# Altium PCB OSI_A15.PcbDoc (part 1 of 2)
Units mil, origin at the board's own origin, x right, y up, seen from the top; angles counter-clockwise.
Board outline 5750 x 3400 mil, 2 copper layers (Top Layer, Bottom Layer); 1 components, 123 nets, 352 pads, 0 vias.
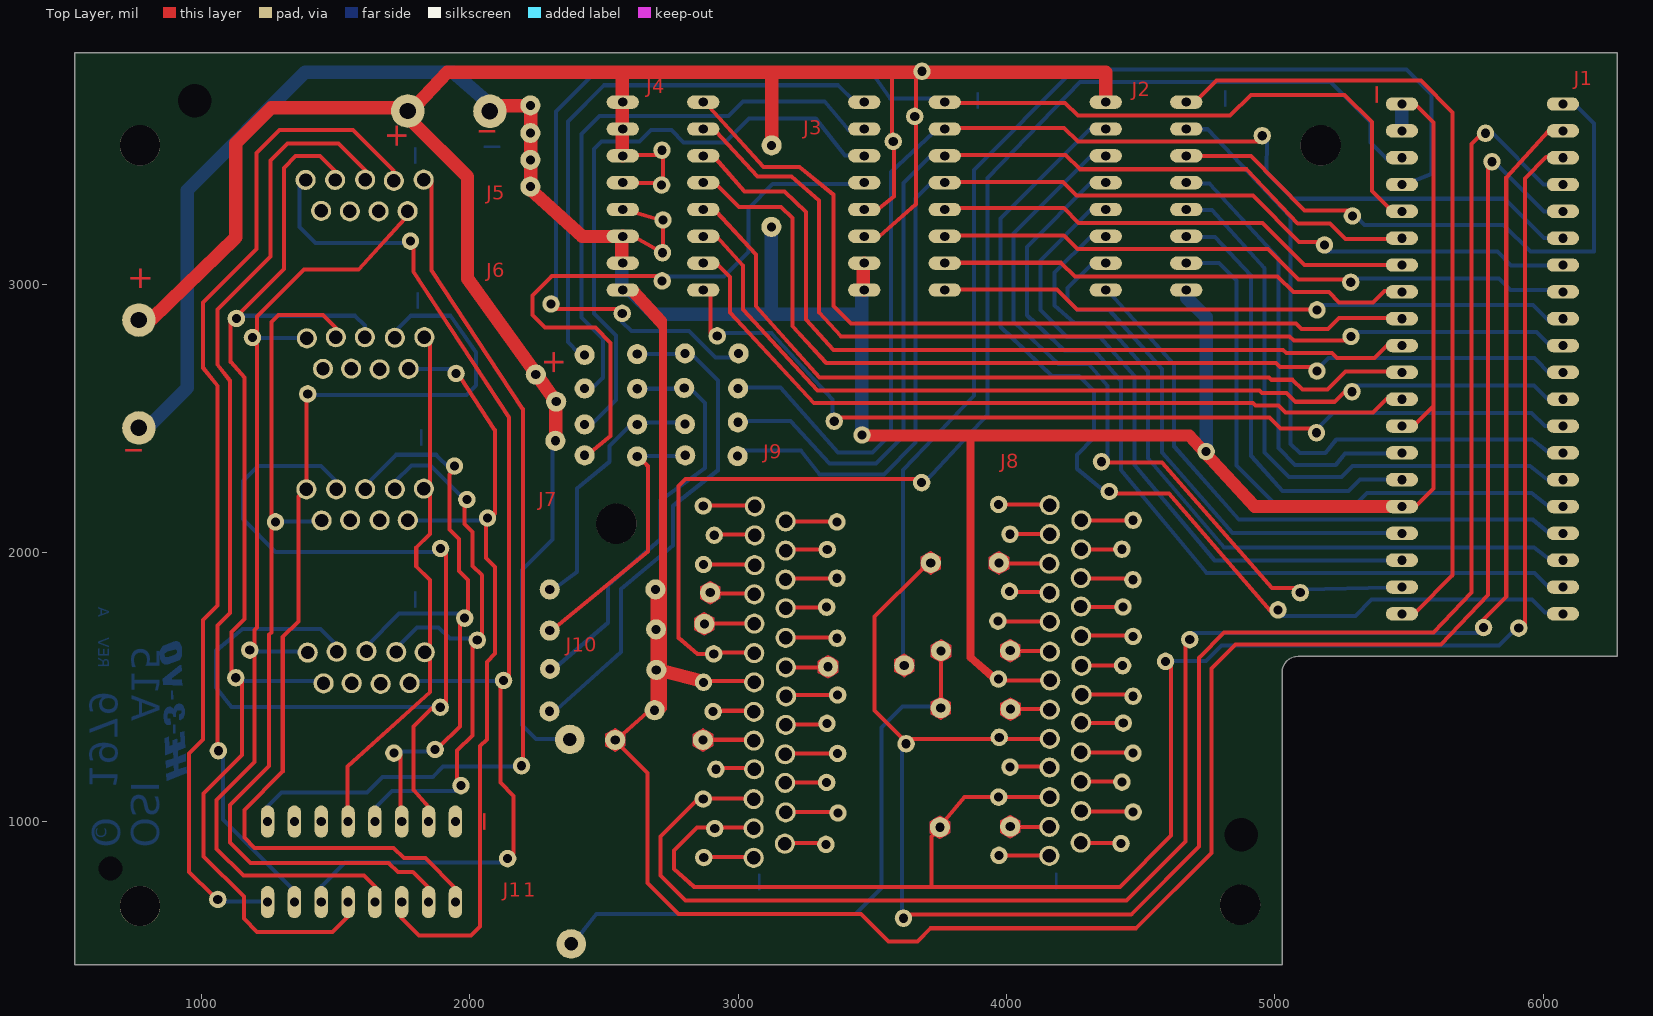
[diagram p0: Top Layer view]
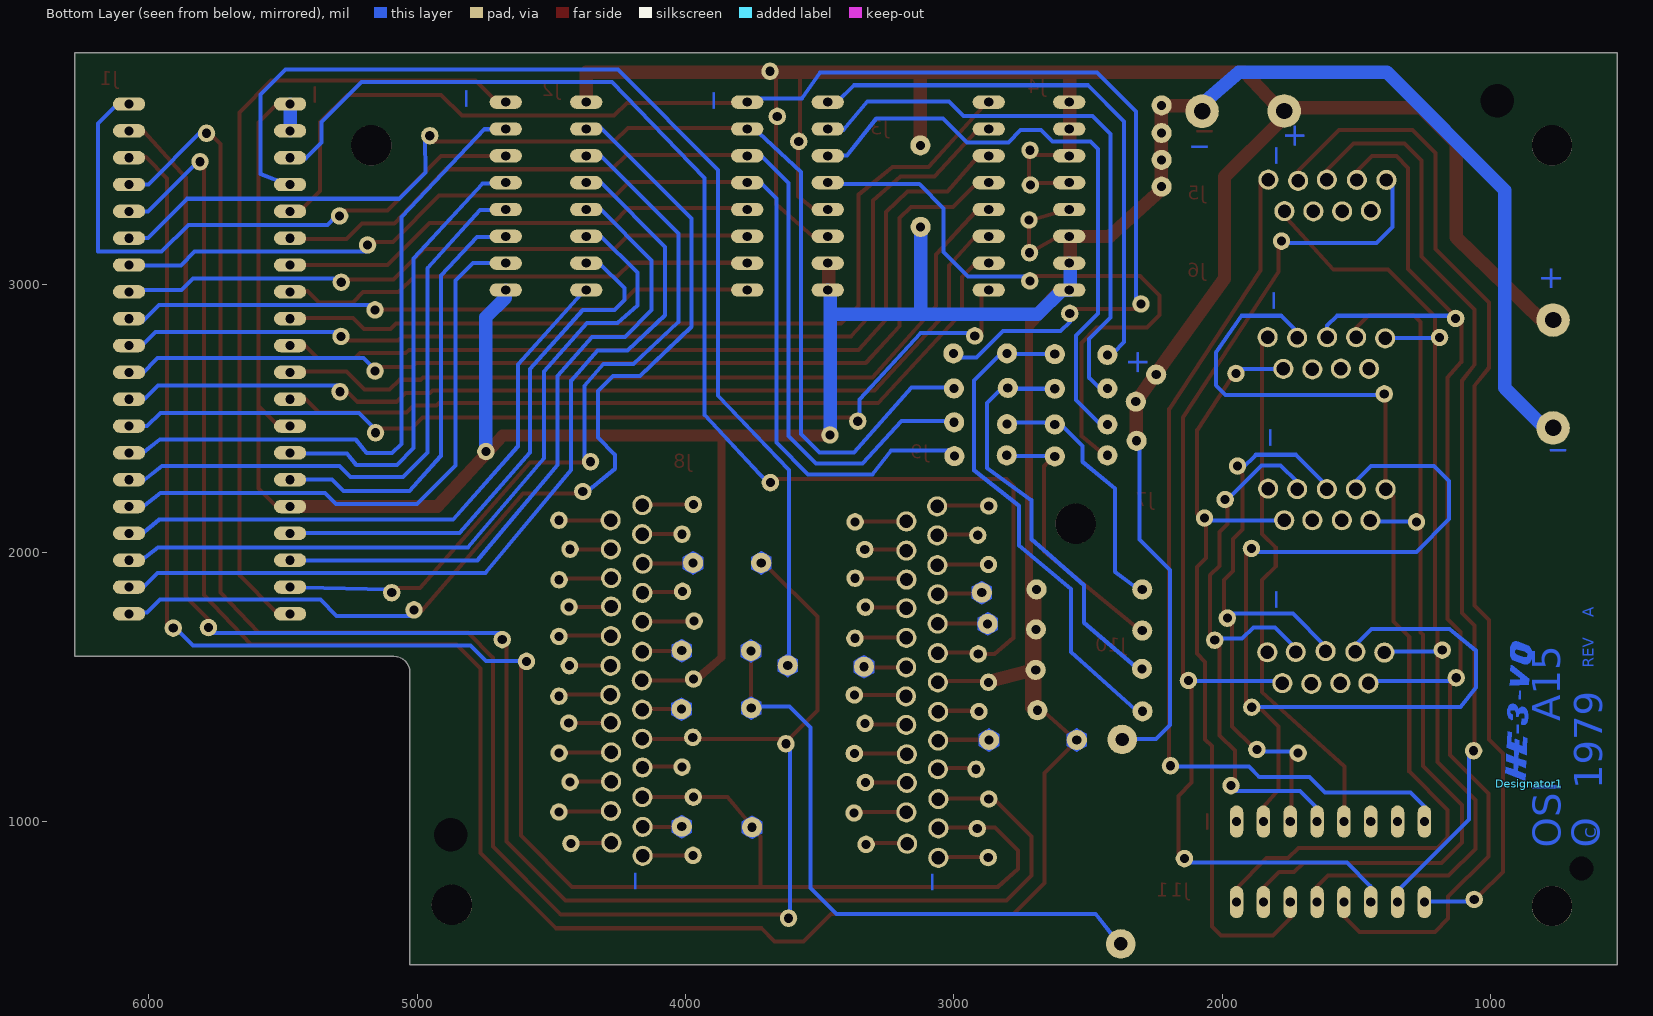
[diagram p1: Bottom Layer view, seen from below]

## Layer stack, top to bottom
Top Solder: solder mask 0.4, Solder Resist, Dk 3.5
Top Layer: signal copper 1.4
Dielectric 1: dielectric 12.6, FR-4, Dk 4.8
Bottom Layer: signal copper 1.4
Bottom Solder: solder mask 0.4, Solder Resist, Dk 3.5

## Board outline
527,464 527,3864 6277,3864 6277,1614 5087,1613.9 5075.2,1612.8 5064,1609.4 5053.6,1603.8 5044.5,1596.4 5037.1,1587.3 5031.5,1576.9 5028.1,1565.7 5027,1554 5027,464

## Design rules (kind name [scope] priority, off if disabled: settings)
Clearance [All] p1: gap=10 ignorepadtopadclearanceinfootprint=FALSE except(0: Arc-Hole Track-Hole SMDPad-Hole THPad-Hole Via-Hole Fill-Hole Poly-Hole Region-Hole Text-Hole; 6: Arc-Text Track-Text)
HoleSize [All] p1: absolutevalues=TRUE maxlimit=250 minlimit=8 maxpercent=80.000 minpercent=20.000
MinimumSolderMaskSliver [All] p1: minsoldermaskwidth=0.5
PolygonConnect [All] p1: connectstyle=Relief reliefconductorwidth=10 reliefentries=4 polygonreliefangle="90 Angle" airgapwidth=10
RoutingVias [All] p1: holewidth=28 width=50 viastyle="Through Hole" minholewidth=28 minwidth=50 maxholewidth=28 maxwidth=50
SolderMaskExpansion [All] p1: expansion=4
Width [All] p1: maxlimit=60 minlimit=6 preferedwidth=10 minimp=50.000000 maximp=50.000000 favimp=50.000000
28 further rules are at their usual default settings.

## Components (designator, comment, footprint, x,y, rotation, side; value= is the part's Value field where it differs from the comment)
Designator1 "Comment" HHE-3-V0 855,1139 r93 bottom locked

## Footprints (in the part's own frame and the unit in brackets; to place one, negate y for a bottom-side part, rotate by r counter-clockwise, add the part's x,y. Pads: shape width x height; smd on the part's side, far side on the other; paste and mask are expansions set on the pad)
HHE-3-V0 [mil] "Manufacturing mark HHE-3-V0"
  Top Layer region: 169.23,17 173.63,31 173.64,31.24 173.55,31.46 173.37,31.61 173.13,31.67 173.13,31.67 138.82,31.49 143.37,46.38 158.76,46.45 159.01,46.46 159.22,46.59 159.35,46.8 159.35,46.8 163.83,61.82 163.94,62.03 163.94,62.26 163.84,62.47 163.66,62.62 163.43,62.67 163.43,62.67 148.32,62.61 152.55,76.46 186.72,76.63 186.9,76.5 187.11,76.45 187.32,76.5 187.5,76.63 187.61,76.82 187.61,76.82 191.95,91.03 191.97,91.27 191.87,91.49 191.69,91.65 191.46,91.7 191.46,91.7 156.46,91.52 156.45,91.52 156.44,91.52 156.44,91.52 156.44,91.52 156.44,91.52 129.19,91.52 128.98,91.48 128.8,91.35 128.7,91.16 128.7,91.16 128.7,91.16 128.7,91.16 128.7,91.15 128.7,91.15 119.94,62.49 98.18,62.4 106.87,90.85 106.88,90.86 106.88,90.86 106.88,90.86 106.88,90.86 106.89,91.09 106.8,91.31 106.62,91.47 106.38,91.52 106.38,91.52 80.09,91.52 79.88,91.48 79.71,91.35 79.6,91.16 79.6,91.16 79.6,91.15 70.78,62.28 50.18,62.2 58.94,90.85 58.94,90.86 58.95,91.09 58.86,91.31 58.68,91.47 58.45,91.52 58.45,91.52 34.26,91.52 34.05,91.48 33.87,91.35 33.77,91.16 33.77,91.16 33.77,91.15 11.2,17.3 11.2,17.29 11.2,17.29 11.2,17.29 11.2,17.3 11.2,17.3 11.2,17.29 11.18,17.22 11.18,17.14 11.18,17.14 11.22,16.95 11.33,16.78 11.49,16.67 11.69,16.63 11.69,16.63 35.88,16.63 36.09,16.67 36.26,16.8 36.37,16.99 36.37,16.99 36.37,16.99 36.37,16.99 36.37,17 36.37,17 45.27,46.11 45.43,46.01 45.63,45.97 45.63,45.97 65.82,46.06 57.03,17.3 57.03,17.29 57.01,17.22 57.01,17.14 57.01,17.14 57.05,16.95 57.16,16.78 57.33,16.67 57.52,16.63 57.52,16.63 83.82,16.63 84.03,16.67 84.2,16.8 84.31,16.99 84.31,16.99 84.31,16.99 84.31,16.99 84.31,17 84.31,17 93.22,46.17 114.98,46.26 106.13,17.3 106.13,17.29 106.11,17.22 106.11,17.14 106.11,17.14 106.17,16.89 106.36,16.7 106.62,16.63 106.62,16.63 133.84,16.46 133.85,16.46 133.86,16.46 133.87,16.46 133.86,16.46 133.84,16.46 133.84,16.46 133.87,16.46 168.75,16.64 168.96,16.68 169.13,16.81 169.23,17
  Top Layer region: 361.67,92.23 368.95,21.16 390.98,21.16 438.29,87.83 437.91,93 417.6,93.57 390.78,54.69 387.72,54.69 383.89,92.42
  Top Layer region: 444.47,45.35 454.01,80.58 456.58,85.56 459.98,89.57 463.83,92.59 467.91,95.08 473.05,97.04 497.45,98.33 506.36,97.35 512.78,95.61 518.45,93.04 523.06,89.79 527.14,82.16 527.51,75.82 526.31,68.49 522.23,57.76 513.33,29.62 504.29,22.01 495.71,18.03 489.52,15.76 466.4,15.23 456.13,18.71 450.16,21.81 443.66,29.28 443.06,40.46 444.47,45.35 469.57,44.97 469.57,34.95 472.29,32.38 483.02,32.23 487.55,37.14 489.67,41.82 491.18,46.81 493.52,54.36 497.3,70.08 497.45,74.16 495.56,77.4 492.46,79.82 489.29,80.88 486.12,80.65 482.42,78.91 479.32,74.23 476.45,67.05 473.96,61.16 470.93,50.66 469.58,44.97
  Top Layer region: 253.75,75.34 234.16,74.15 233.63,78.73 235.62,84.11 239.61,89.15 245.91,92.94 249.3,95 256.27,96.39 265.04,97.26 270.95,96.53 281.04,94.73 286.09,92.28 291.2,86.96 294.59,82.18 295.38,74.94 293.46,69.23 289.67,63.99 286.22,60.47 281.17,58.41 276.92,56.35 276.92,55.29 277.19,54.16 281.57,50.44 284.23,46.06 285.13,37.59 283.82,33.08 281.93,30 277.67,25.75 272.7,22.74 268.52,20.98 255.04,18.69 243,17.84 236.59,18.69 225.72,20.98 219.06,26.47 218.02,29.93 217.43,39.94 219.1,41.62 240.26,40.53 240.26,33.73 242.48,31.24 246.28,30.33 254.78,31.18 259.33,32.91 260.88,36.5 260.21,46.48 256.42,51.32 253.41,53.55 249.42,53.68 246.67,53.94 246.54,61.79 258.58,63.29 264.79,64.47 267.67,66.89 269.96,69.44 270.42,72.12 270.42,81.28 268.52,85.15 261.21,85.48 256.88,81.14 254.98,77.48
  Top Layer region: 311.84,56.46 343.93,56.9 344.55,49.99 312.39,49.15
  Top Layer region: 185.08,57.69 217.17,58.13 217.79,51.22 185.62,50.39

## Free pads (board coordinates)
  round 40 hole 90: 1(660.5,823.5)
  round 125 hole 61: 1(767,2465) 1(767,2867) 1(1769,3646) 1(2075,3645)
  round 150 hole 150: 1(771,683) 1(771,3518) 1(2546,2108) 1(4871,688) 1(5171,3518)
  round 40 hole 125: 1(975.5,3683.5) 1(4875.5,948.5)
  round 65 hole 34: 1(1061,708) 1(1063,1262) 1(1128,1534) 1(1130,2873) 1(1180,1637) 1(1190,2802) 1(1276,2115) 1(1396,2592) 1(1717,1253) 1(1779,3161) 1(1871,1267) 1(1890,1424) 1(1891,2016) 1(1943,2323) 1(1949,2668) 1(1967,1132) 1(1981,1756) 1(1989,2198) 1(2028,1674) 1(2066,2129) 1(2126,1524) 1(2141,860) 1(2193,1206) 1(2303,2927) 1(2568,2892) 1(2715,3370) 1(2716,3500) 1(2717,3013) 1(2718,3118) 1(2720,3240) 1(2870,1082) 1(2870,2174) 1(2871,1517) 1(2871,1956) 1(2872,864) 1(2907,1408) 1(2909,1623) 1(2911,2065) 1(2913,972) 1(2917,1193) 1(2922,2808) 1(3327,913) 1(3330,1144) 1(3330,1797) 1(3331,1364) 1(3332,2012) 1(3358,2490) 1(3368,1905) 1(3368,2115) 1(3369,1681) 1(3371,1252) 1(3371,1470) 1(3372,1030) 1(3462,2439) 1(3578,3533) 1(3616,638) 1(3626,1288) 1(3658,3626) 1(3684,2261) 1(3685,3794) 1(3968,1745) 1(3970,1529) 1(3971,1089) 1(3971,2180) 1(3972,872) 1(3973,1312) 1(4011,1856) 1(4013,1201) 1(4013,2069) 1(4354,2339) 1(4383,2228) 1(4427,916) 1(4430,1145) 1(4430,2013) 1(4433,1579) 1(4434,1798) 1(4435,1365) 1(4471,1253) 1(4471,1899) 1(4472,1034) 1(4472,1465) 1(4472,1688) 1(4472,2121) 1(4593,1595) 1(4683,1676) 1(4744,2377) 1(4953,3554) 1(5012,1787) 1(5095,1851) 1(5155,2447) 1(5157,2677) 1(5157,2905) 1(5185,3147) 1(5283,3008) 1(5284,2806) 1(5288,2600) 1(5289,3255) 1(5778,1721) 1(5785,3563) 1(5809,3457) 1(5909,1719)
  oval 50x120 hole 34: 1(1246.5,698) 1(1246.5,998) 1(1346.5,698) 1(1346.5,998) 1(1446.5,698) 1(1446.5,998) 1(1546.5,698) 1(1546.5,998) 1(1646.5,698) 1(1646.5,998) 1(1746.5,698) 1(1746.5,998) 1(1846.5,698) 1(1846.5,998) 1(1946.5,698) 1(1946.5,998)
  round 75 hole 50: 1(1388,3389) 1(1391,2236) 1(1393,2799) 1(1396,1628) 1(1446,3274) 1(1448,2120) 1(1453,2685) 1(1455,1513) 1(1498,3389) 1(1501,2803) 1(1502,2236) 1(1504,1631) 1(1553,3272) 1(1554,2121) 1(1558,2686) 1(1560,1514) 1(1609,2803) 1(1610,2237) 1(1610,3390) 1(1615,1633) 1(1660,3272) 1(1664,2121) 1(1664,2683) 1(1668,1511) 1(1717,3386) 1(1721,2237) 1(1721,2801) 1(1726,1630) 1(1768,3273) 1(1769,2121) 1(1772,2685) 1(1776,1514) 1(1828,3390) 1(1829,2239) 1(1831,2803) 1(1832,1629) 1(3057.5,973) 1(3057.5,1082) 1(3058,863) 1(3058.5,1300) 1(3059,1407) 1(3059.5,1193) 1(3059.5,1517) 1(3060,1626) 1(3060.5,1735.5) 1(3060.5,1845) 1(3061.5,1953.5) 1(3062,2064.5) 1(3062.5,2172.5) 1(3174,915.5) 1(3175,1142) 1(3175,1249) 1(3176.5,1900) 1(3177,1032.5) 1(3177,1682.5) 1(3177,1793) 1(3177,2008) 1(3177,2116.5) 1(3177.5,1358.5) 1(3178,1573) 1(3178.5,1464.5) 1(4160,870.5) 1(4160,978) 1(4160,1959) 1(4160.5,1199.5) 1(4160.5,1850) 1(4161,1089) 1(4161,2177.5) 1(4161.5,1306.5) 1(4161.5,1415) 1(4161.5,1742.5) 1(4162,1631) 1(4162,2069.5) 1(4163,1524) 1(4276.5,919.5) 1(4277,1905.5) 1(4277.5,1147) 1(4277.5,1256) 1(4277.5,1799.5) 1(4278,1037.5) 1(4278,1689) 1(4278,2012.5) 1(4278.5,1366.5) 1(4279,2120.5) 1(4279.5,1578.5) 1(4280,1470.5)
  round 75 hole 34: 1(2226,3364) 1(2226,3464) 1(2226,3564) 1(2226,3667) 1(2246,2664) 1(2297,1409) 1(2298,1710) 1(2298,1863) 1(2299,1567) 1(2319,2417) 1(2322,2563) 1(2428,2363) 1(2428,2478) 1(2428,2612) 1(2428,2737) 1(2542,1302) 1(2624,2359) 1(2624,2478) 1(2624,2611) 1(2624,2740) 1(2689,1413) 1(2692,1863) 1(2694,1714) 1(2695,1563) 1(2799,2614) 1(2802,2479) 1(2802,2743) 1(2803,2363) 1(2869,1302) 1(2874,1735) 1(2896,1851) 1(2998,2360) 1(2999,2486) 1(3000,2612) 1(3002,2743) 1(3124,3214) 1(3125,3518) 1(3335,1575) 1(3619,1580) 1(3718,1962) 1(3752,977) 1(3755,1421) 1(3756,1634) 1(3972,1962) 1(4014,979) 1(4014,1635) 1(4015,1417)
  round 110 hole 50: 1(2373,1304) 1(2378,542)
  oval 120x50 hole 34: 1(2570,2979) 1(2570,3079) 1(2570,3179) 1(2570,3279) 1(2570,3379) 1(2570,3479) 1(2570,3579) 1(2570,3679) 1(2870,2979) 1(2870,3079) 1(2870,3179) 1(2870,3279) 1(2870,3379) 1(2870,3479) 1(2870,3579) 1(2870,3679) 1(3470,2979) 1(3470,3079) 1(3470,3179) 1(3470,3279) 1(3470,3379) 1(3470,3479) 1(3470,3579) 1(3470,3679) 1(3770,2979) 1(3770,3079) 1(3770,3179) 1(3770,3279) 1(3770,3379) 1(3770,3479) 1(3770,3579) 1(3770,3679) 1(4370,2979) 1(4370,3079) 1(4370,3179) 1(4370,3279) 1(4370,3379) 1(4370,3479) 1(4370,3579) 1(4370,3679) 1(4670,2979) 1(4670,3079) 1(4670,3179) 1(4670,3279) 1(4670,3379) 1(4670,3479) 1(4670,3579) 1(4670,3679) 1(5473.5,1772) 1(5473.5,1872) 1(5473.5,1972) 1(5473.5,2072) 1(5473.5,2172) 1(5473.5,2272) 1(5473.5,2372) 1(5473.5,2472) 1(5473.5,2572) 1(5473.5,2672) 1(5473.5,2772) 1(5473.5,2872) 1(5473.5,2972) 1(5473.5,3072) 1(5473.5,3172) 1(5473.5,3272) 1(5473.5,3372) 1(5473.5,3472) 1(5473.5,3572) 1(5473.5,3672) 1(6073.5,1772) 1(6073.5,1872) 1(6073.5,1972) 1(6073.5,2072) 1(6073.5,2172) 1(6073.5,2272) 1(6073.5,2372) 1(6073.5,2472) 1(6073.5,2572) 1(6073.5,2672) 1(6073.5,2772) 1(6073.5,2872) 1(6073.5,2972) 1(6073.5,3072) 1(6073.5,3172) 1(6073.5,3272) 1(6073.5,3372) 1(6073.5,3472) 1(6073.5,3572) 1(6073.5,3672)

## Nets (pads, with @x,y where several pads share a name; then routed paths per layer and width w, separated by ;. In a path a pad name is that pad's centre, name@x,y a point inside that pad or via, vN(x,y) a via of type N, cw(c..) or ccw(c..) an arc to the next point about the centre after c; other vN are vias at no path point)
$Net0: pad.1@2870,3179 pad.1@5288,2600 pad.1@6073.5,2572 | length 3620.5
  Top Layer w15: pad.1@2870,3179 2920,3179 3017.5,3069.5 3017.5,2907 3295.5,2604 4943.5,2604 4952.5,2595 5044,2595 5076.5,2562.5 5223,2562.5 5260,2599.5 pad.1@5288,2600
  Bottom Layer w15: pad.1@5288,2600 5294,2623 5966,2623 6015,2574 6073,2574 pad.1@6073.5,2572
$Net2: pad.1@4670,3579 pad.1@6073.5,2372 | length 2445.8
  Bottom Layer w15: pad.1@4670,3579 4692,3578 4750,3578 5059,3251 5059,2405 5093,2371 5188,2371 5229,2422 5959,2422 6022,2373 pad.1@6073.5,2372
$Net3: pad.1@4670,3279 pad.1@6073.5,2272 | length 2262.4
  Bottom Layer w15: pad.1@4670,3279 4704,3277 4766,3277 4962,3060 4962,2373 5053,2282 5248,2282 5289,2323 5951,2323 6024,2265 pad.1@6073.5,2272
$Net4: pad.1@4670,3079 pad.1@6073.5,2172 | length 2215.4
  Bottom Layer w15: pad.1@4670,3079 4703,3080 4792,3080 4857,3015 4857,2325 5000,2182 5302,2182 5343,2223 5956,2223 6025,2169 pad.1@6073.5,2172
$Net5: pad.1@4370,2979 pad.1@6073.5,2072 | length 2273.7
  Bottom Layer w15: pad.1@4370,2979 4390,2963 4625,2702 4625,2396 4867,2123 5962,2123 6027,2069 pad.1@6073.5,2072
$Net6: pad.1@4370,3179 pad.1@6073.5,1972 | length 2864.3
  Bottom Layer w15: pad.1@4370,3179 4339,3181 4316,3181 4179,3044 4179,2921 4253,2856 4367,2856 4527,2675 4527,2352 4811,2020 5965,2020 6030,1970 pad.1@6073.5,1972
$Net7: pad.1@4370,3379 pad.1@6073.5,1872 | length 3283.9
  Bottom Layer w15: pad.1@4370,3379 4314,3377 4076,3139 4076,2885 4216,2754 4328,2754 4426,2641 4426,2309 4745,1925 5968,1925 6026,1867 pad.1@6073.5,1872
$Net11: pad.1@4670,3679 pad.1@5473.5,1772 | length 3042.4
  Top Layer w15: pad.1@4670,3679 4713,3690 4782,3759 5544.5,3759 5662.5,3641 5662.5,1916 5526,1779.5 pad.1@5473.5,1772
$Net13: pad.1@4370,3279 pad.1@5473.5,1972 | length 2462.3
  Bottom Layer w15: pad.1@4370,3279 4321,3284 4126,3089 4126,2904 4226,2804 4349,2804 4477,2659 4477,2327 4776,1971 5436,1971 pad.1@5473.5,1972
$Net14: pad.1@4370,3079 pad.1@5473.5,2072 | length 2030.7
  Bottom Layer w15: pad.1@4370,3079 4320,3077 4228,2987 4228,2942 4265,2905 4383,2905 4580,2684 4580,2374 4842,2073 5438,2073 pad.1@5473.5,2072
$Net15: pad.1@767,2465 pad.1@2075,3645 pad.1@2226,3364 pad.1@2226,3464 pad.1@2226,3564 pad.1@2226,3667 pad.1@2542,1302 pad.1@2570,2979 pad.1@2570,3079 pad.1@2570,3179 pad.1@2570,3279 pad.1@2689,1413 pad.1@2692,1863 pad.1@2694,1714 pad.1@2695,1563 pad.1@2718,3118 pad.1@2720,3240 pad.1@2871,1517 pad.1@3059.5,1517 pad.1@3124,3214 pad.1@3462,2439 pad.1@3470,2979 pad.1@3470,3079 pad.1@3970,1529 pad.1@4163,1524 pad.1@4670,2979 pad.1@4744,2377 pad.1@5473.5,2172 pad.1@5473.5,2472 pad.1@5473.5,3572 pad.1@5473.5,3672 pad.1@5809,3457 pad.1@6073.5,3272 | length 24742
  Top Layer w8: pad.1@2559.33,1331.98 2571.5,1324.95 2576.6,1322 2576.89,1302.52 pad.1@2576.9,1301.9 ; pad.1@2507,1301.9 pad.1@2542,1302 ; pad.1@2507,1301.9 2507,1301.83 2507.1,1281.6 pad.1@2524.5,1271.6 ; pad.1@2507,1301.9 2507,1322.1 pad.1@2524.4,1332.2 ; pad.1@2524.4,1332.2 pad.1@2542,1302 ; pad.1@2524.4,1332.2 2525,1332.53 2542,1342 2559.3,1332 pad.1@2542,1302 ; pad.1@2524.5,1271.6 2541.8,1261.6 2559.34,1271.61 pad.1@2559.5,1271.7 ; pad.1@2524.5,1271.6 pad.1@2542,1302 ; pad.1@2542,1302 2543.33,1299.69 2546.79,1293.71 pad.1@2559.5,1271.7 ; pad.1@2542,1302 2545.89,1301.99 pad.1@2576.9,1301.9 ; pad.1@2559.5,1271.7 2559.77,1271.86 2565.35,1275.15 2576.8,1281.9 2576.9,1301.83 pad.1@2576.9,1301.9
  Top Layer w15: pad.1@2542,1302 pad.1@2542,1298.5 ; pad.1@2570,3179 2615.5,3176 2718.15,3118.26 pad.1@2719.5,3117.5 ; pad.1@2570,3279 2609.5,3270 2719.13,3237.11 pad.1@2719.5,3237 ; pad.1@2689,1413 2663,1407 2571.5,1324.95 2545.89,1301.99 2543.74,1300.06 2543.33,1299.69 pad.1@2542,1298.5 ; pad.1@2718,3118 pad.1@2719.5,3117.5 ; pad.1@2720,3240 pad.1@2719.5,3237 ; pad.1@2871,1517 2882.5,1522.5 3035.5,1522.5 pad.1@3059.5,1517 ; pad.1@3970,1529 3989.5,1524.5 4135,1524.5 pad.1@4163,1524 ; pad.1@5473.5,2172 5523.5,2171.5 5590.5,2238.5 5590.5,2546.5 ; pad.1@5473.5,2472 5522,2478 5590.5,2546.5 ; pad.1@5473.5,3672 5521.5,3673 5590.5,3604 5590.5,2546.5 ; pad.1@5809,3457 5794,3439.5 5794,1842 5619.5,1658 4854,1658 4764,1568 4764,881.5 4483,600.5 3717,600.5 3668,551.5 3560,551.5 3458.5,653 2777,653 2661.5,768.5 2661.5,1179 2565.35,1275.15 2546.79,1293.71 pad.1@2542,1298.5 ; pad.1@2719.5,3117.5 pad.1@2719.5,3237
  Top Layer w30: pad.1@3970,1529 3949,1537.5 3866,1610 3866,2428.5 ; pad.1@5473.5,2172 pad.1@5444.5,2163 ; pad.1@2688,1419 pad.1@2689,1413 pad.1@2693.93,1419 ; pad.1@2688,1419 pad.1@2693.93,1419 ; pad.1@2688,1419 pad.1@2688,1854 ; pad.1@2688,1854 pad.1@2692,1863 2695,1861.5 pad.1@2720.5,1861.5 ; pad.1@2688,1854 2700.5,1854 2700.5,1563 2700.5,1427 pad.1@2693.93,1419 ; pad.1@2693.93,1419 2720.5,1419 2720.5,1558.71 pad.1@2720.5,1861.5 ; pad.1@2720.5,1861.5 2720.5,2839 ; 2720.5,2839 2601.5,2970.5 pad.1@2570,2979 2613,2982 2720.5,2866 2720.5,2839 ; 3866,2428.5 4678.5,2428.5 4734.22,2367.99 4923,2163 pad.1@5444.5,2163 ; 3866,2428.5 3459,2428.5 pad.1@3462,2439 3472,2445 4684,2445 4745.66,2378.54 4928,2182 5444.5,2182 pad.1@5444.5,2163
  Top Layer w50: pad.1@2075,3645 2088.5,3665.5 pad.1@2226.5,3665.5 ; pad.1@2226,3364 pad.1@2226.5,3354 ; pad.1@2226,3667 pad.1@2226.5,3665.5 ; pad.1@2570,3079 2567,3081.5 pad.1@2567,3178.5 ; pad.1@2570,3179 pad.1@2567,3178.5 ; pad.1@2695,1563 2700.5,1563 2704,1563 2720.5,1558.71 2863.5,1521.5 pad.1@2871,1517 ; pad.1@3470,2979 3466,2985 3466,3074 pad.1@3470,3079 ; pad.1@2226.5,3354 2419.5,3178.5 pad.1@2567,3178.5 ; pad.1@2226.5,3354 pad.1@2226.5,3665.5
  Bottom Layer w8: pad.1@2559.33,1331.98 2576.6,1322 2576.89,1302.52 pad.1@2576.9,1301.9 ; pad.1@2507,1301.9 pad.1@2542,1302 ; pad.1@2507,1301.9 2507,1301.83 2507.1,1281.6 pad.1@2524.5,1271.6 ; pad.1@2507,1301.9 2507,1322.1 pad.1@2524.4,1332.2 ; pad.1@2524.4,1332.2 pad.1@2542,1302 ; pad.1@2524.4,1332.2 2525,1332.53 2542,1342 2559.3,1332 pad.1@2542,1302 ; pad.1@2524.5,1271.6 2541.8,1261.6 2559.34,1271.61 pad.1@2559.5,1271.7 ; pad.1@2524.5,1271.6 pad.1@2542,1302 ; pad.1@2542,1302 pad.1@2576.9,1301.9 ; pad.1@2542,1302 pad.1@2559.5,1271.7 ; pad.1@2559.5,1271.7 2559.77,1271.86 2576.8,1281.9 2576.9,1301.83 pad.1@2576.9,1301.9
  Bottom Layer w15: pad.1@5809,3457 5828,3447 6003,3272 pad.1@6073.5,3272
  Bottom Layer w50: pad.1@767,2465 792,2481 814,2481 947,2614 947,3351 1386,3790 1938,3790 2061,3684 pad.1@2075,3645 ; pad.1@2570,2979 pad.1@2567,2977 ; pad.1@2570,3079 2567,3073 pad.1@2567,2977 ; pad.1@3124,3214 3124,2888 ; pad.1@3462,2439 3461,2446 3461,2888 ; pad.1@3470,2979 3461,2969 3461,2888 ; pad.1@4670,2979 4671,2969 4671,2950 4744,2877 pad.1@4744,2377 ; pad.1@5473.5,3572 pad.1@5473.5,3672 ; pad.1@2567,2977 2598,2977 2687,2888 3124,2888 ; 3124,2888 3461,2888
$Net16: pad.1@4670,3179 pad.1@5473.5,2272 | length 1614.7
  Bottom Layer w15: pad.1@4670,3179 4688,3177 4777,3177 4912,3033 4912,2360 5029,2230 5275,2230 5318,2273 5461,2273 pad.1@5473.5,2272
$Net17: pad.1@4670,3379 pad.1@5473.5,2372 | length 1679.2
  Bottom Layer w15: pad.1@4670,3379 4694,3375 4757,3375 5013,3096 5013,2390 5076,2327 5227,2327 5262,2370 5460,2370 pad.1@5473.5,2372
$Net18: pad.1@2870,3079 pad.1@5473.5,2572 | length 2938.3
  Top Layer w15: pad.1@2870,3079 2920.5,3075.5 2969,3027 2969,2895.5 3282,2557 4919.5,2557 4928,2548.5 5014,2548.5 5039.5,2523 5366,2523 5416.5,2573.5 5448,2573.5 pad.1@5473.5,2572
$Net19: pad.1@2870,3279 pad.1@5473.5,2672 | length 3033.1
  Top Layer w15: pad.1@2870,3279 2916.5,3273 3067,3112 3067,2918.5 3303.5,2653.5 4979,2653.5 4988,2644.5 5066.5,2644.5 5103,2608 5195.5,2608 5263.5,2676 5425,2676 pad.1@5473.5,2672
$Net20: pad.1@2870,3479 pad.1@5473.5,2772 | length 3174.3
  Top Layer w15: pad.1@2870,3479 2914.5,3470.5 3024,3345.5 3173.5,3345.5 3253.5,3269.5 3253.5,2869.5 3355.5,2756 5030.5,2756 5043,2743.5 5213.5,2743.5 5231,2726 5371.5,2726 5419.5,2774 pad.1@5473.5,2772
$Net21: pad.1@2870,3679 pad.1@5473.5,2872 | length 3213.1
  Top Layer w15: pad.1@2870,3679 2891.5,3662 3094.5,3437 3229,3437 3355,3334 3355,2919.5 3420.5,2854 5079.5,2854 5100,2833.5 5198,2833.5 5238.5,2874 5430.5,2874 pad.1@5473.5,2872
$Net22: pad.1@3770,3079 pad.1@5473.5,2972 | length 1782.5
  Top Layer w15: pad.1@3770,3079 3812.5,3080.5 4203.5,3080.5 4254.5,3029.5 5010.5,3029.5 5069,2971 5202,2971 5240,2933 5366.5,2933 5409,2975.5 5450.5,2975.5 pad.1@5473.5,2972
$Net23: pad.1@3770,3279 pad.1@5473.5,3072 | length 1791.3
  Top Layer w15: pad.1@3770,3279 3804,3284 4213.5,3284 4268,3229.5 4954,3229.5 5110.5,3073 5433.5,3073 pad.1@5473.5,3072
$Net24: pad.1@2999,2486 pad.1@3770,3479 pad.1@5473.5,3172 | length 3708.2
  Top Layer w15: pad.1@3770,3479 3814.5,3482.5 4220,3482.5 4273.5,3429 4894.5,3429 5085.5,3226 5206.5,3226 5264,3168.5 5433.5,3168.5 pad.1@5473.5,3172
  Bottom Layer w15: pad.1@2999,2486 3018,2491 3195,2491 3340,2332 3513,2332 3616,2435 3616,3378 3720,3482 pad.1@3770,3479
$Net26: pad.1@3619,1580 pad.1@5473.5,3372 | length 5167.9
  Top Layer w8: pad.1@3636.33,1609.98 3653.6,1600 3653.89,1580.52 pad.1@3653.9,1579.9 ; pad.1@3584,1579.9 pad.1@3619,1580 ; pad.1@3584,1579.9 3584,1579.83 3584.1,1559.6 pad.1@3601.5,1549.6 ; pad.1@3584,1579.9 3584,1600.1 pad.1@3601.4,1610.2 ; pad.1@3601.4,1610.2 pad.1@3619,1580 ; pad.1@3601.4,1610.2 3602,1610.53 3619,1620 3636.3,1610 pad.1@3619,1580 ; pad.1@3601.5,1549.6 3618.8,1539.6 3636.34,1549.61 pad.1@3636.5,1549.7 ; pad.1@3601.5,1549.6 pad.1@3619,1580 ; pad.1@3619,1580 pad.1@3653.9,1579.9 ; pad.1@3619,1580 pad.1@3636.5,1549.7 ; pad.1@3636.5,1549.7 3636.77,1549.86 3653.8,1559.9 3653.9,1579.83 pad.1@3653.9,1579.9
  Bottom Layer w8: pad.1@3636.33,1609.98 3653.6,1600 3653.89,1580.52 pad.1@3653.9,1579.9 ; pad.1@3584,1579.9 pad.1@3619,1580 ; pad.1@3584,1579.9 3584,1579.83 3584.1,1559.6 pad.1@3601.5,1549.6 ; pad.1@3584,1579.9 3584,1600.1 pad.1@3601.4,1610.2 ; pad.1@3601.4,1610.2 pad.1@3619,1580 ; pad.1@3601.4,1610.2 3602,1610.53 3614,1617.22 3619,1620 3636.3,1610 pad.1@3619,1580 ; pad.1@3601.5,1549.6 3618.8,1539.6 3636.34,1549.61 pad.1@3636.5,1549.7 ; pad.1@3601.5,1549.6 pad.1@3619,1580 ; pad.1@3619,1580 pad.1@3653.9,1579.9 ; pad.1@3619,1580 pad.1@3636.5,1549.7 ; pad.1@3636.5,1549.7 3636.77,1549.86 3653.8,1559.9 3653.9,1579.83 pad.1@3653.9,1579.9
  Bottom Layer w15: pad.1@3619,1580 3614,1593 3614,1617.22 3614,2309 3879,2585 3879,3427 4252,3800 5491,3800 5584,3707 5584,3411 5488,3374 pad.1@5473.5,3372
$Net29: pad.1@3616,638 pad.1@3626,1288 pad.1@3718,1962 pad.1@3973,1312 pad.1@4161.5,1306.5 pad.1@5785,3563 pad.1@6073.5,3372 | length 8060.3
  Top Layer w8: pad.1@3735.33,1991.98 3752.6,1982 3752.89,1962.52 pad.1@3752.9,1961.9 ; pad.1@3683,1961.9 pad.1@3718,1962 ; pad.1@3683,1961.9 3683,1961.83 3683.1,1941.6 3686.28,1939.78 pad.1@3700.5,1931.6 ; pad.1@3683,1961.9 3683,1982.1 pad.1@3700.4,1992.2 ; pad.1@3700.4,1992.2 pad.1@3718,1962 ; pad.1@3700.4,1992.2 3701,1992.53 3718,2002 3735.3,1992 pad.1@3718,1962 ; pad.1@3700.5,1931.6 3717.8,1921.6 3735.34,1931.61 pad.1@3735.5,1931.7 ; pad.1@3700.5,1931.6 pad.1@3718,1962 ; pad.1@3718,1962 pad.1@3752.9,1961.9 ; pad.1@3718,1962 pad.1@3735.5,1931.7 ; pad.1@3735.5,1931.7 3735.77,1931.86 3752.8,1941.9 3752.9,1961.83 pad.1@3752.9,1961.9
  Top Layer w15: pad.1@3616,638 3632,652.5 4465,652.5 4717,904.5 4717,1608.5 4810.5,1702 5591.5,1702 5732.5,1851.5 5732.5,3522.5 5765.5,3555.5 pad.1@5785,3563 ; pad.1@3626,1288 pad.1@3614,1306.5 ; pad.1@3718,1962 3697.5,1951 3686.28,1939.78 3508,1761.5 3508,1412.5 pad.1@3614,1306.5 ; pad.1@4161.5,1306.5 pad.1@3614,1306.5
  Bottom Layer w8: pad.1@3735.33,1991.98 3752.6,1982 3752.89,1962.52 pad.1@3752.9,1961.9 ; pad.1@3683,1961.9 pad.1@3718,1962 ; pad.1@3683,1961.9 3683,1961.83 3683.1,1941.6 pad.1@3700.5,1931.6 ; pad.1@3683,1961.9 3683,1982.1 pad.1@3700.4,1992.2 ; pad.1@3700.4,1992.2 pad.1@3718,1962 ; pad.1@3700.4,1992.2 3701,1992.53 3718,2002 3735.3,1992 pad.1@3718,1962 ; pad.1@3700.5,1931.6 3717.8,1921.6 3735.34,1931.61 pad.1@3735.5,1931.7 ; pad.1@3700.5,1931.6 pad.1@3718,1962 ; pad.1@3718,1962 pad.1@3752.9,1961.9 ; pad.1@3718,1962 pad.1@3735.5,1931.7 ; pad.1@3735.5,1931.7 3735.77,1931.86 3752.8,1941.9 3752.9,1961.83 pad.1@3752.9,1961.9
  Bottom Layer w15: pad.1@3616,638 3610,654 3610,1274 pad.1@3626,1288 ; pad.1@5785,3563 5809,3565 6001,3373 6056,3373 pad.1@6073.5,3372
$Net31: pad.1@3000,2612 pad.1@3770,3579 pad.1@4953,3554 pad.1@6073.5,3172 | length 4516.3
  Top Layer w15: pad.1@3770,3579 3809,3582.5 4215,3582.5 4266,3531.5 4942,3531.5 pad.1@4953,3554
  Bottom Layer w15: pad.1@3000,2612 3017,2616 3158,2616 3372,2373 3500,2373 3569,2442 3569,3418 3727,3565 pad.1@3770,3579 ; pad.1@4953,3554 4955,3555 4971,3541 4969,3417 5067,3319 5858,3319 6004,3173 6050,3173 pad.1@6073.5,3172
$Net32: pad.1@2998,2360 pad.1@3770,3379 pad.1@5185,3147 pad.1@6073.5,3072 | length 4248.1
  Top Layer w15: pad.1@3770,3379 3794,3381 4210,3381 4260.5,3330.5 4918,3330.5 5090.5,3158 5169.5,3158 pad.1@5185,3147
  Bottom Layer w15: pad.1@2998,2360 3018,2380 3234,2380 3303,2292 3543,2292 3661,2410 3661,3320 3717,3376 pad.1@3770,3379 ; pad.1@5185,3147 5188,3122 5829,3122 5880,3071 6053,3071 pad.1@6073.5,3072
$Net33: pad.1@3770,3179 pad.1@5283,3008 pad.1@6073.5,2972 | length 2398.3
  Top Layer w15: pad.1@3770,3179 3809.5,3182.5 4213.5,3182.5 4264,3132 4975,3132 5088.5,3018.5 5259.5,3018.5 pad.1@5283,3008
  Bottom Layer w15: pad.1@5283,3008 5296,3022 5835,3022 5878,2979 6028,2979 pad.1@6073.5,2972
$Net34: pad.1@3770,2979 pad.1@5157,2905 pad.1@6073.5,2872 | length 2371.9
  Top Layer w15: pad.1@3770,2979 3817.5,2981.5 4187.5,2981.5 4262.5,2906.5 5129.5,2906.5 pad.1@5157,2905
  Bottom Layer w15: pad.1@5157,2905 5169,2923 5963,2923 6026,2860 pad.1@6073.5,2872
$Net35: pad.1@2870,3579 pad.1@5284,2806 pad.1@6073.5,2772 | length 3809.7
  Top Layer w15: pad.1@2870,3579 2917,3570 3071.5,3402 3199.5,3402 3301,3312 3301,2896 3384,2806.5 5055.5,2806.5 5071.5,2790.5 5261.5,2790.5 pad.1@5284,2806
  Bottom Layer w15: pad.1@5284,2806 5295,2822 5976,2822 6030,2768 pad.1@6073.5,2772
$Net36: pad.1@2870,3379 pad.1@5157,2677 pad.1@6073.5,2672 | length 3781.4
  Top Layer w15: pad.1@2870,3379 2912.5,3379.5 3003.5,3288.5 3160.5,3288.5 3202,3247 3202,2844 3328.5,2707.5 5004,2707.5 5019.5,2692 5138,2692 pad.1@5157,2677
  Bottom Layer w15: pad.1@5157,2677 5156,2681 5200,2725 5968,2725 6028,2665 pad.1@6073.5,2672
$Net37: pad.1@4670,3479 pad.1@5289,3255 pad.1@6073.5,3672 | length 2292.1
  Top Layer w15: pad.1@4670,3479 4910.5,3479 5110,3274.5 5277,3274.5 pad.1@5289,3255
  Bottom Layer w15: pad.1@5289,3255 5304,3252 5334,3222 5853,3222 5953,3122 6189,3122 6189,3600 6121,3668 pad.1@6073.5,3672
$Net39: pad.1@4354,2339 pad.1@4370,3479 pad.1@5095,1851 pad.1@5473.5,1872 | length 2890.9
  Top Layer w15: pad.1@4354,2339 4372,2336.5 4579,2336.5 4989,1869 5092.5,1869 pad.1@5095,1851
  Bottom Layer w15: pad.1@4354,2339 4363,2341 4377,2355 4377,2622 4306,2704 4194,2704 4027,2860 4027,3190 4319,3482 pad.1@4370,3479 ; pad.1@5095,1851 5106,1862 5428,1871 pad.1@5473.5,1872
$Net40: pad.1@4370,3579 pad.1@4383,2228 pad.1@5012,1787 pad.1@6073.5,1772 | length 3801.2
  Top Layer w15: pad.1@4383,2228 4398,2221 4606,2221 4982.5,1784.5 5005,1784.5 pad.1@5012,1787
  Bottom Layer w15: pad.1@4370,3579 4316,3584 3977,3245 3977,2842 4170,2658 4271,2658 4327,2602 4327,2429 4263,2365 4263,2313 4361,2233 pad.1@4383,2228 ; pad.1@5012,1787 5020,1765 5300,1765 5360,1825 5958,1825 6006,1777 6052,1777 pad.1@6073.5,1772
$Net41: pad.1@767,2867 pad.1@1769,3646 pad.1@2246,2664 pad.1@2319,2417 pad.1@2322,2563 pad.1@2373,1304 pad.1@2570,3379 pad.1@2570,3479 pad.1@2570,3579 pad.1@2570,3679 pad.1@2715,3370 pad.1@2716,3500 pad.1@3125,3518 pad.1@3470,3179 pad.1@3470,3279 pad.1@3578,3533 pad.1@3658,3626 pad.1@3685,3794 pad.1@4370,3679 | length 9528.7
  Top Layer w15: pad.1@2570,3379 2597.5,3378.5 pad.1@2720,3378.5 ; pad.1@2570,3479 2606.5,3482 pad.1@2720,3482 ; pad.1@2715,3370 pad.1@2720,3378.5 ; pad.1@2716,3500 pad.1@2720,3482 ; pad.1@3470,3179 3477.5,3180 3527.5,3180 3662,3298.5 pad.1@3662,3785 ; pad.1@3470,3279 3517.5,3277 3581.5,3328 pad.1@3581.5,3529 ; pad.1@3578,3533 pad.1@3581.5,3529 ; pad.1@2720,3378.5 pad.1@2720,3482 ; pad.1@3581.5,3529 3573,3537.5 3573,3785 pad.1@3662,3785 ; pad.1@3662,3785 3662,3790.5 3662,3791 pad.1@3685,3794 3679.17,3790.5 3670,3785 pad.1@3662,3785
  Top Layer w50: pad.1@767,2867 769.5,2869.5 812.5,2869.5 1128.5,3175 1128.5,3526 1260.5,3658 1751,3658 pad.1@1769,3646 ; pad.1@2246,2664 pad.1@2245,2669 ; pad.1@2319,2417 2321,2423 pad.1@2321,2562.5 ; pad.1@2322,2563 pad.1@2321,2562.5 ; pad.1@2570,3479 2568,3490 2568,3790.5 ; pad.1@3125,3518 3125,3790.5 ; pad.1@4370,3679 4370,3790.5 3679.17,3790.5 3662,3790.5 3125,3790.5 ; pad.1@1769,3646 1802,3668.5 1916,3790.5 2568,3790.5 ; pad.1@1769,3646 1785.5,3606.5 1991.5,3400.5 1991.5,3021 pad.1@2245,2669 ; pad.1@2245,2669 2247.7,2665.21 pad.1@2321,2562.5 ; 2568,3790.5 3125,3790.5
  Bottom Layer w15: pad.1@2319,2417 2308,2406 2308,2050 2194,1936 2194,1358 2247,1305 2331,1305 pad.1@2373,1304
$Net44: pad.1@2428,2478 pad.1@3470,3479 | length 2283.8
  Bottom Layer w15: pad.1@2428,2478 2452,2476 2545,2569 2545,2809 2463,2891 2463,3504 2491,3532 2633,3532 2676,3575 2751,3575 2797,3529 2951,3529 3040,3618 3289,3618 3398,3480 3437,3480 pad.1@3470,3479
$Net45: pad.1@2428,2612 pad.1@3470,3579 | length 2186.6
  Bottom Layer w15: pad.1@2428,2612 2446,2602 2496,2652 2496,2797 2416,2877 2416,3560 2484,3628 2965,3628 3019,3682 3322,3682 3411,3576 3451,3576 pad.1@3470,3579
$Net46: pad.1@2428,2737 pad.1@3470,3679 | length 2086.9
  Bottom Layer w15: pad.1@2428,2737 2406,2745 2366,2785 2366,3607 2501,3742 3373,3742 3433,3682 pad.1@3470,3679
$Net48: pad.1@2303,2927 pad.1@2568,2892 pad.1@3002,2743 pad.1@3770,3679 pad.1@5473.5,3272 | length 5188.8
  Top Layer w15: pad.1@2303,2927 2308.5,2908.5 2559.5,2908.5 pad.1@2568,2892 ; pad.1@3770,3679 3804,3676.5 4219,3676.5 4266,3629.5 4833.5,3629.5 4910.5,3706.5 5260,3706.5 5361.5,3605 5361.5,3348.5 5436.5,3273.5 pad.1@5473.5,3272
  Bottom Layer w15: pad.1@2303,2927 2322,2939 2322,3645 2466,3789 3499,3789 3566,3693 3737,3693 pad.1@3770,3679 ; pad.1@2568,2893 pad.1@2568,2892 2568,2860 2602,2826 2817,2826 2915,2728 2980,2728 pad.1@3002,2743
$Net49: pad.1@2297,1409 pad.1@2624,2740 pad.1@2802,2743 | length 1900.3
  Bottom Layer w15: pad.1@2297,1409 2324,1415 2564,1630 2564,1865 2757,2027 2757,2175 2925,2307 2925,2642 pad.1@2827,2740 ; pad.1@2624,2740 pad.1@2827,2740 ; pad.1@2802,2743 pad.1@2827,2740
$Net50: pad.1@2299,1567 pad.1@2624,2611 pad.1@2799,2614 | length 1568.2
  Bottom Layer w15: pad.1@2299,1567 2325,1577 2515,1739 2515,1879 2711,2050 2711,2196 2876,2315 2876,2558 pad.1@2823,2611 ; pad.1@2624,2611 pad.1@2823,2611 ; pad.1@2799,2614 pad.1@2823,2611
$Net51: pad.1@2298,1863 pad.1@2624,2478 pad.1@2802,2479 | length 988.8
  Bottom Layer w15: pad.1@2298,1863 2304,1857 2400,1929 2400,2239 2521,2339 2521,2397 pad.1@2609,2485 ; pad.1@2624,2478 pad.1@2609,2485 ; pad.1@2802,2479 2789,2485 pad.1@2609,2485
$Net52: pad.1@2298,1710 pad.1@2624,2359 pad.1@2803,2363 | length 1023
  Top Layer w15: pad.1@2298,1710 2323.5,1725.5 2665,2005 2665,2322 2638.5,2350 pad.1@2624,2359
  Bottom Layer w15: pad.1@2624,2359 2642,2361 2790,2361 pad.1@2803,2363
$Net53: pad.1@2870,2979 pad.1@2922,2808 pad.1@3358,2490 pad.1@5155,2447 pad.1@6073.5,2472 | length 3630
  Top Layer w15: pad.1@2870,2979 2897.5,2964.5 2897.5,2818 pad.1@2922,2808 ; pad.1@3358,2490 3377.5,2504 4980,2504 5020.5,2463.5 5140.5,2463.5 pad.1@5155,2447
  Bottom Layer w15: pad.1@2922,2808 2938,2818 3125,2818 3351,2571 3351,2512 pad.1@3358,2490 ; pad.1@5155,2447 5153,2457 5217,2521 5957,2521 6006,2472 pad.1@6073.5,2472
$Net54: pad.1@2870,2174 pad.1@3062.5,2172.5 | length 192.9
  Top Layer w15: pad.1@2870,2174 2885,2176 3034.5,2176 pad.1@3062.5,2172.5
$Net55: pad.1@2911,2065 pad.1@3062,2064.5 | length 151.3
  Top Layer w15: pad.1@2911,2065 2934,2067.5 3040.5,2067.5 pad.1@3062,2064.5
$Net56: pad.1@2871,1956 pad.1@3061.5,1953.5 | length 190.7
  Top Layer w15: pad.1@2871,1956 2882.5,1956.5 3032.5,1956.5 pad.1@3061.5,1953.5
$Net57: pad.1@2896,1851 pad.1@3060.5,1845 | length 1066.8
  Top Layer w8: pad.1@2913.33,1880.98 2930.6,1871 2930.89,1851.52 pad.1@2930.9,1850.9 ; pad.1@2861,1850.9 pad.1@2896,1851 ; pad.1@2861,1850.9 2861,1871.1 pad.1@2878.4,1881.2 ; pad.1@2861,1850.9 2861,1850.83 2861.1,1830.6 pad.1@2878.5,1820.6 ; pad.1@2878.4,1881.2 pad.1@2896,1851 ; pad.1@2878.4,1881.2 2879,1881.53 2896,1891 2913.3,1881 pad.1@2896,1851 ; pad.1@2878.5,1820.6 2895.8,1810.6 2913.34,1820.61 pad.1@2913.5,1820.7 ; pad.1@2878.5,1820.6 pad.1@2896,1851 ; pad.1@2896,1851 pad.1@2930.9,1850.9 ; pad.1@2896,1851 pad.1@2913.5,1820.7 ; pad.1@2913.5,1820.7 2913.77,1820.86 2930.8,1830.9 2930.89,1848 2930.9,1850.83 pad.1@2930.9,1850.9
  Top Layer w15: pad.1@2896,1851 2910.5,1848 2930.89,1848 3031,1848 pad.1@3060.5,1845
  Bottom Layer w8: pad.1@2913.33,1880.98 2930.6,1871 2930.89,1851.52 pad.1@2930.9,1850.9 ; pad.1@2861,1850.9 pad.1@2896,1851 ; pad.1@2861,1850.9 2861,1850.83 2861.1,1830.6 pad.1@2878.5,1820.6 ; pad.1@2861,1850.9 2861,1871.1 pad.1@2878.4,1881.2 ; pad.1@2878.4,1881.2 pad.1@2896,1851 ; pad.1@2878.4,1881.2 2879,1881.53 2896,1891 2913.3,1881 pad.1@2896,1851 ; pad.1@2878.5,1820.6 2895.8,1810.6 2913.34,1820.61 pad.1@2913.5,1820.7 ; pad.1@2878.5,1820.6 pad.1@2896,1851 ; pad.1@2896,1851 pad.1@2930.9,1850.9 ; pad.1@2896,1851 pad.1@2913.5,1820.7 ; pad.1@2913.5,1820.7 2913.77,1820.86 2930.8,1830.9 2930.9,1850.83 pad.1@2930.9,1850.9
$Net58: pad.1@2874,1735 pad.1@3060.5,1735.5 | length 1088.4
  Top Layer w8: pad.1@2891.33,1764.98 2908.6,1755 2908.88,1736.5 2908.89,1735.52 pad.1@2908.9,1734.9 ; pad.1@2839,1734.9 pad.1@2874,1735 ; pad.1@2839,1734.9 2839,1755.1 pad.1@2856.4,1765.2 ; pad.1@2839,1734.9 2839,1734.83 2839.1,1714.6 pad.1@2856.5,1704.6 ; pad.1@2856.4,1765.2 pad.1@2874,1735 ; pad.1@2856.4,1765.2 2857,1765.53 2874,1775 2891.3,1765 pad.1@2874,1735 ; pad.1@2856.5,1704.6 2873.8,1694.6 2891.34,1704.61 pad.1@2891.5,1704.7 ; pad.1@2856.5,1704.6 pad.1@2874,1735 ; pad.1@2874,1735 pad.1@2908.9,1734.9 ; pad.1@2874,1735 pad.1@2891.5,1704.7 ; pad.1@2891.5,1704.7 2891.77,1704.86 2908.8,1714.9 2908.9,1734.83 pad.1@2908.9,1734.9
  Top Layer w15: pad.1@2874,1735 2895,1736.5 2908.88,1736.5 3036,1736.5 pad.1@3060.5,1735.5
  Bottom Layer w8: pad.1@2891.33,1764.98 2908.6,1755 2908.89,1735.52 pad.1@2908.9,1734.9 ; pad.1@2839,1734.9 pad.1@2874,1735 ; pad.1@2839,1734.9 2839,1734.83 2839.1,1714.6 pad.1@2856.5,1704.6 ; pad.1@2839,1734.9 2839,1755.1 pad.1@2856.4,1765.2 ; pad.1@2856.4,1765.2 pad.1@2874,1735 ; pad.1@2856.4,1765.2 2857,1765.53 2874,1775 2891.3,1765 pad.1@2874,1735 ; pad.1@2856.5,1704.6 2873.8,1694.6 2891.34,1704.61 pad.1@2891.5,1704.7 ; pad.1@2856.5,1704.6 pad.1@2874,1735 ; pad.1@2874,1735 pad.1@2908.9,1734.9 ; pad.1@2874,1735 pad.1@2891.5,1704.7 ; pad.1@2891.5,1704.7 2891.77,1704.86 2908.8,1714.9 2908.9,1734.83 pad.1@2908.9,1734.9